# EAGLE board injector (EAGLE 6.6.0)
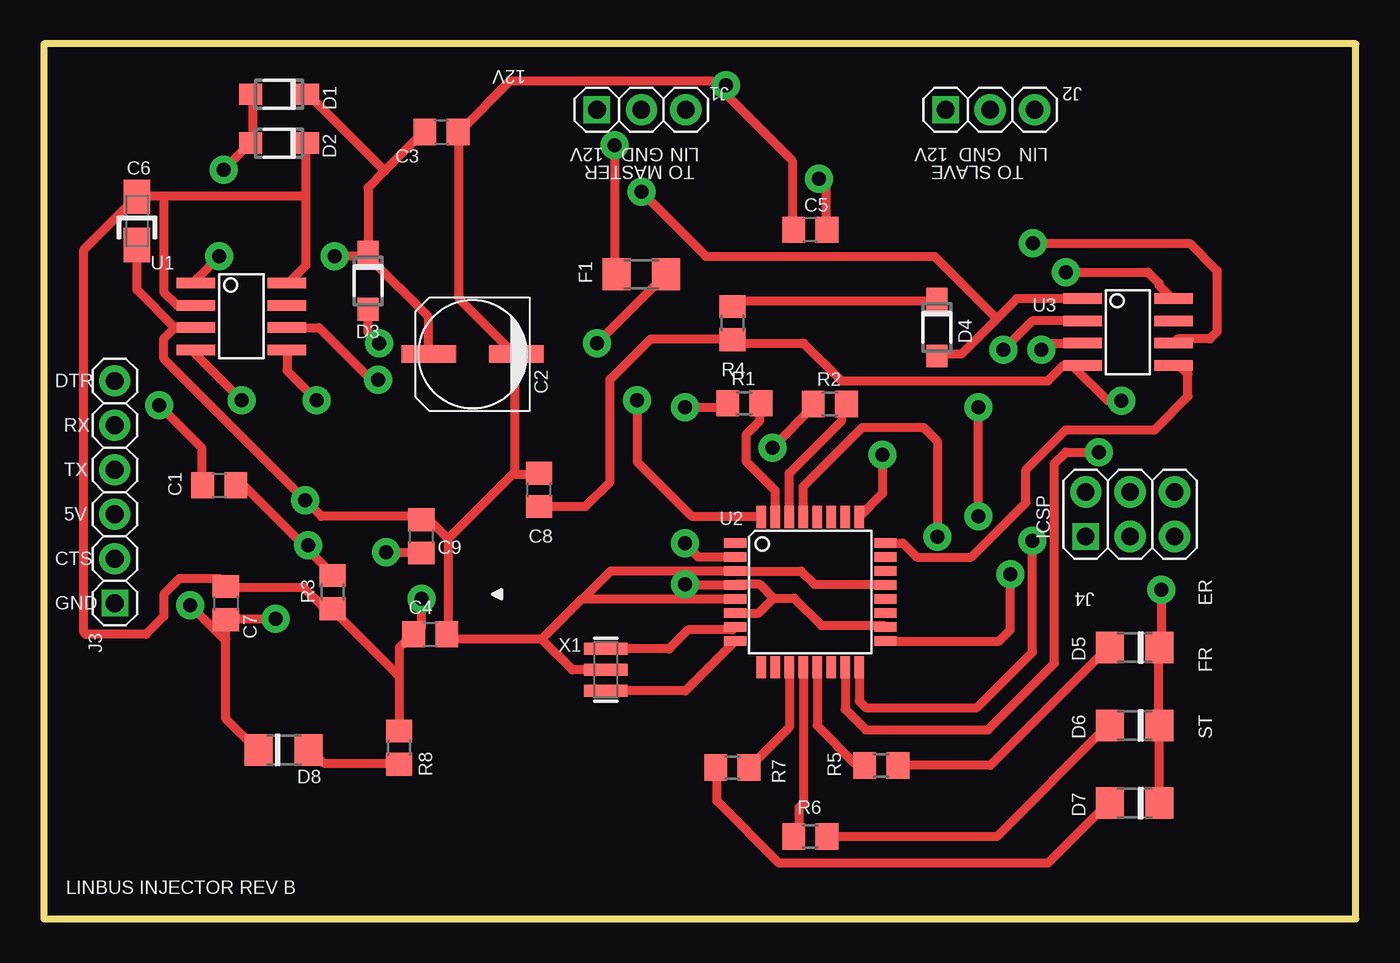
[diagram p0: board, top side]
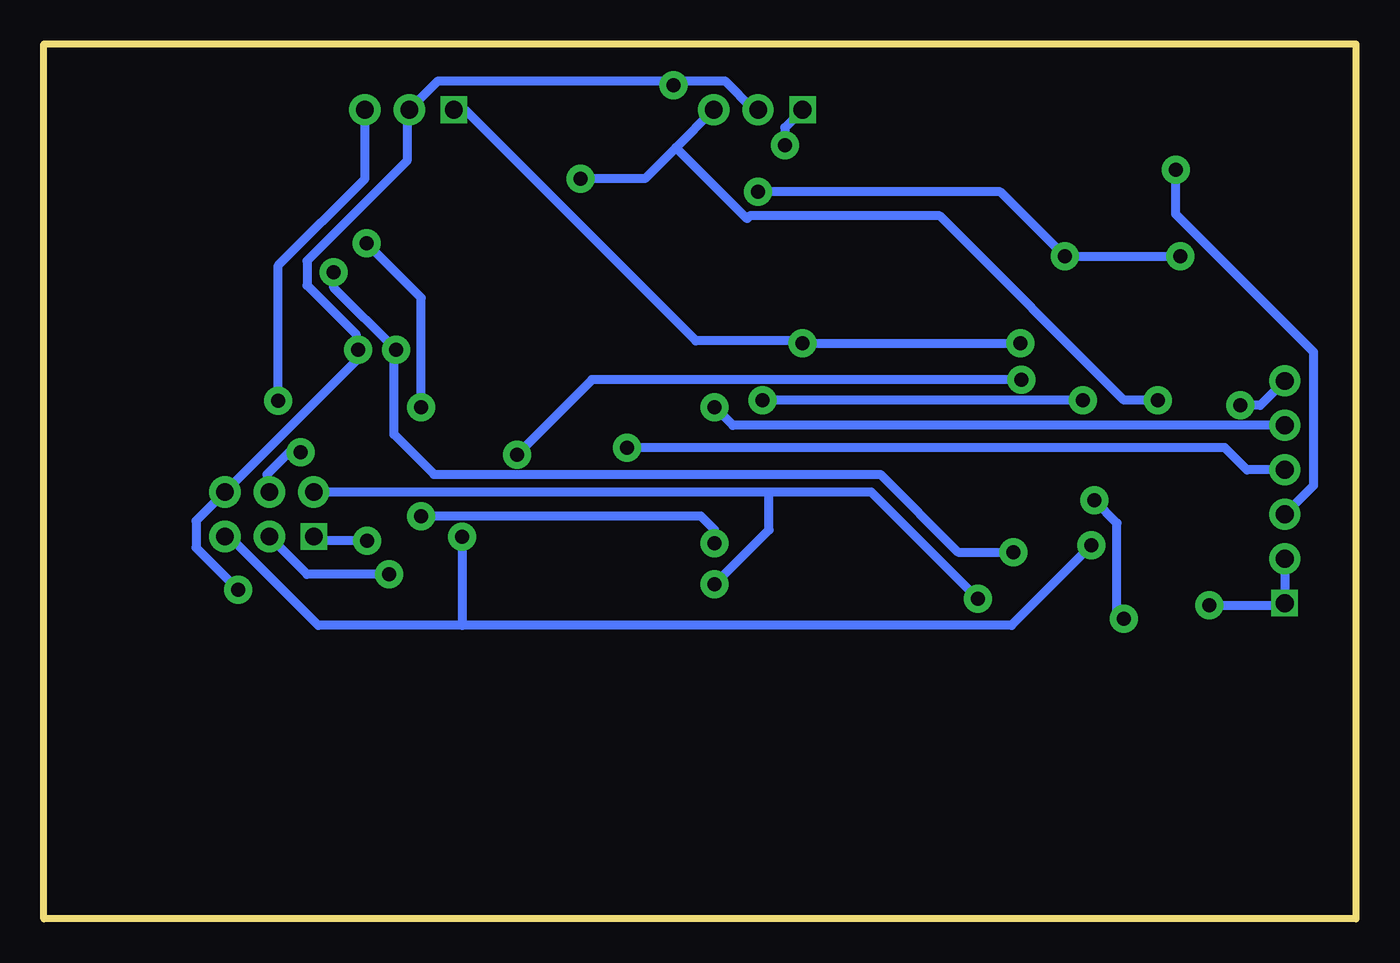
[diagram p1: board, bottom side, seen from below]

Size 75 x 50 mm. Coordinates in mm from the lower left corner, seen from the top.
Outline: 0,0 75,0 75,50 0,50 0,0
Copper layers (1*16): Top 0.035mm / dielectric 1.5mm / Bottom 0.035mm
Design rules "LINbus_rules *": minimum track width 0.5mm, minimum drill 0.8mm, track to track 16mil, track to pad 16mil, pad to pad 16mil, via to via 0.5mm, smd to smd 0mil, copper to edge 1mm, drill to drill 1mm, minimum pad ring 10mil, minimum via ring 0.4mm, stop-mask expansion 4mil, vias tented up to drill 20mil, thermal gap 10mil
Net classes: 1 vcc: width 0.254 mm
tRestrict: area 30.5,45.1 to 38.1,47.6; area 50.2,45.1 to 58.4,47.6; area 58.4,20.3 to 66,25.4; area 2.5,16.5 to 5.7,31.8; area 60.3,30.5 to 63.5,36.2; area 9.5,31.8 to 12.7,36.8

## Footprints (pad centres in the part's own frame; a part is rotated, then mirrored left to right if it is on the bottom)
C0805 = smd 1.3 x 1.5: 1 -0.95,0; 2 0.95,0
UD-6,3X5,8_NICHICON = smd 3.1 x 1: + 2.5,0; - -2.5,0
A/3216-18R = smd 1.95 x 1.5: + 1.375,0; - -1.375,0
SOD123FL = smd 1.31 x 1.22: A 1.625,0; C -1.625,0
1206-LED = smd 1.6 x 1.803: A -1.422,0; C 1.422,0
1206 = smd 1.6 x 1.803: 1 -1.422,0; 2 1.422,0
1X03 = drill 1.016 square: 1 -2.54,0 | drill 1.016 pad 1.778: 2 0,0; 3 2.54,0
1X06 = drill 1.016 square: 1 6.35,0 | drill 1.016 pad 1.778: 2 3.81,0; 3 1.27,0; 4 -1.27,0; 5 -3.81,0; 6 -6.35,0
2X03 = drill 1.016 square: 1 -2.54,-1.27 | drill 1.016 pad 1.778: 2 -2.54,1.27; 3 0,-1.27; 4 0,1.27; 5 2.54,-1.27; 6 2.54,1.27
R0805 = smd 1.3 x 1.5: 1 -0.95,0; 2 0.95,0
SO-08 = smd 0.6 x 2.2: 1 -1.905,-2.6; 2 -0.635,-2.6; 3 0.635,-2.6; 4 1.905,-2.6; 5 1.905,2.6; 6 0.635,2.6; 7 -0.635,2.6; 8 -1.905,2.6
TQFP32-08 = smd 1.27 x 0.559: 1 -4.293,2.8; 2 -4.293,2; 3 -4.293,1.2; 4 -4.293,0.4; 5 -4.293,-0.4; 6 -4.293,-1.2; 7 -4.293,-2; 8 -4.293,-2.8; 17 4.293,-2.8; 18 4.293,-2; 19 4.293,-1.2; 20 4.293,-0.4; 21 4.293,0.4; 22 4.293,1.2; 23 4.293,2; 24 4.293,2.8 | smd 0.559 x 1.27: 9 -2.8,-4.293; 10 -2,-4.293; 11 -1.2,-4.293; 12 -0.4,-4.293; 13 0.4,-4.293; 14 1.2,-4.293; 15 2,-4.293; 16 2.8,-4.293; 25 2.8,4.293; 26 2,4.293; 27 1.2,4.293; 28 0.4,4.293; 29 -0.4,4.293; 30 -1.2,4.293; 31 -2,4.293; 32 -2.8,4.293
RESONATOR-SMD = smd 0.7 x 2.5: 1 -1.2,0; 2 0,0; 3 1.2,0

## Placement (x,y rotation side)
C1  0.1uF  [C0805]  10.03,24.77 0 top
C2  22uF 40V  [UD-6,3X5,8_NICHICON]  24.51,32.26 180 top
C3  0.1uF 50V  [C0805]  22.73,44.96 0 top
C4  0.1uF  [C0805]  22.1,16.26 0 top
C5  220pF  [C0805]  43.81,39.37 180 top
C6  10uF  [A/3216-18R]  5.33,39.88 90 top
C7  0.1uF  [C0805]  10.41,18.03 270 top
C8  220pF  [C0805]  28.32,24.51 90 top
C9  0.1uF  [C0805]  21.59,21.84 90 top
D1  MBR0540  [SOD123FL]  13.46,47.12 180 top
D2  MBR0540  [SOD123FL]  13.46,44.32 180 top
D3  MBR0540  [SOD123FL]  18.54,36.45 270 top
D4  MBR0540  [SOD123FL]  51.05,33.78 270 top
D5  RED  [1206-LED]  62.36,15.49 0 top
D6  GREEN  [1206-LED]  62.36,11.05 0 top
D7  GREEN  [1206-LED]  62.36,6.6 0 top
D8  BLUE  [1206-LED]  13.72,9.65 180 top
F1  500ma Slow  [1206]  34.16,36.83 0 top
J1  [1X03]  34.16,46.23 0 top
J2  [1X03]  54.1,46.23 0 top
J3  [1X06]  4.06,24.38 270 top
J4  ICSP  [2X03]  62.1,23.11 0 top
R1  10K  [R0805]  40.05,29.46 180 top
R2  10K  [R0805]  44.94,29.42 180 top
R3  10k  [R0805]  16.51,18.67 90 top
R4  1K  [R0805]  39.37,34.04 270 top
R5  3.3K  [R0805]  47.88,8.76 180 top
R6  3.3K  [R0805]  43.81,4.7 180 top
R7  3.3K  [R0805]  39.37,8.64 0 top
R8  3.3K  [R0805]  20.32,9.78 90 top
U1  ATA6631  [SO-08]  11.3,34.42 270 top
U2  ATMEGA328  [TQFP32-08]  43.81,18.67 0 top
U3  ATA6631  [SO-08]  61.98,33.53 270 top
X1  16MHz  [RESONATOR-SMD]  32.13,14.22 90 top

## Library data of the parts
C1-C9 D1-D8 F1 J1-J4 R1-R8 U1-U3 X1 = injector

## Nets
+5V: C4.1 C6.+ C7.1 D2.C J4.2 R3.1 R8.2 U1.2 U1.8 U2.4 U2.6 U2.18
+12V: C2.+ C3.1 D1.C D3.C D4.A U1.1 U3.1
DTR: C1.1 J3.6
ERROR_LED: R5.2 U2.13
FRAME_LED: R6.2 U2.12
GND: C2.- C3.2 C4.2 C5.2 C6.- C7.2 C8.2 C9.2 D5.C D6.C D7.C D8.C J1.2 J2.2 J3.1 J3.2 J4.6 U1.3 U2.3 U2.5 U2.21 U3.3 X1.2
GP_DEBUG: U2.10
LIN1: C5.1 J1.3 U1.4
LIN1_RX: U1.5 U2.32
LIN1_TX: U1.6 U2.25
LIN2: C8.1 J2.3 R4.2 U3.4
LIN2_RX: U2.24 U3.5
LIN2_TX: U2.2 U3.6
LIN_BREAK: U2.23
LIN_ISR: U2.26
LIN_TICK: U2.1
MISO/LIN_DATA: J4.1 U2.16
MOSI/LIN_ERR: J4.4 U2.15
N$1: D7.A R7.1
N$2: D8.A R8.1
N$3: D6.A R6.1
N$4: D5.A R5.1
N$6: D3.A F1.2 J2.1
N$9: D4.C R4.1
RESET: C1.2 J4.5 R3.2 U2.29
RXI: J3.5 R1.2
S-5V: D1.A D2.A J3.3
SCK: J4.3 U2.17
SECONDARY_5V: C9.1 U3.2 U3.8
SER_RX: R2.1 U2.30
SER_TX: R1.1 U2.31
STATUS_LED: R7.2 U2.11
TXO: J3.4 R2.2
VBAT: F1.1 J1.1
XTAL1: U2.7 X1.3
XTAL2: U2.8 X1.1

## Tracks (layer width: path | path; a pad name or v marks a point on that pad's centre or on a via)
+5V  (via drill 0.8)
  Top 0.5: 14.99,41.27 14.99,37.34 13.97,36.32 U1.8 | 14.99,41.27 14.99,44.32 D2.C | 14.99,41.27 6.86,41.27 | 6.86,41.27 5.33,41.27 C6.+ 5.21,41.15 2.29,38.23 2.29,16.38 2.41,16.26 5.84,16.26 6.86,17.27 6.86,18.54 7.75,19.43 10.03,19.43 10.29,19.18 C7.1 10.41,18.92 14.86,18.92 15.88,17.91 16.38,17.91 R3.1 16.51,17.65 20.19,13.97 20.32,13.97 | U1.2 7.62,35.05 6.86,35.81 6.86,41.27 | 20.32,13.97 20.32,15.49 21.08,16.26 C4.1 21.34,16.38 21.59,16.64 v21.59,18.29 | 20.32,13.97 R8.2 | U2.6 40.86,17.47 41.72,18.32 | 41.72,18.32 | 41.72,18.32 40.94,19.11 39.56,19.11 U2.4 36.69,19.07 v36.65,19.11 | 41.72,18.32 42.89,18.32 44.45,16.77 48.01,16.77 U2.18
  Bottom 0.5: 33.53,24.38 27.69,24.38 v21.59,18.29 | 33.53,24.38 J4.2 | v36.65,19.11 33.53,22.22 33.53,24.38
+12V  (via drill 0.8)
  Top 0.5: 54.48,34.29 55.63,35.43 U3.1 | 54.48,34.29 52.45,32.26 51.05,32.26 D4.A | D3.C 18.54,41.78 19.49,42.74 | 19.49,42.74 21.72,44.96 C3.1 | 19.49,42.74 15.11,47.12 D1.C | v10.03,37.85 8.76,36.58 8.76,36.32 U1.1 | v16.64,37.85 18.54,37.85 D3.C | C2.+ 21.97,32.26 21.97,34.42 18.67,37.72 D3.C | 54.48,34.29 50.93,37.85 37.85,37.85 v34.16,41.53
  Bottom 0.5: v10.03,37.85 v16.64,37.85 20.32,41.53 v34.16,41.53
DTR  (via drill 0.8)
  Top 0.5: v6.6,29.34 9.02,26.92 9.02,24.77 C1.1
  Bottom 0.5: v6.6,29.34 5.46,29.34 J3.6
ERROR_LED
  Top 0.5: U2.13 44.22,11.03 46.35,8.89 46.8,8.89 R5.2
FRAME_LED
  Top 0.5: U2.12 43.41,6.58 43.18,6.35 43.18,5.01 R6.2
GND  (via drill 0.8)
  Top 0.5: 10.41,16 10.41,11.43 12.19,9.65 D8.C | 10.41,16 C7.2 10.48,17.16 v13.26,17.16 | v8.38,17.91 10.29,16 10.41,16 | C6.- 5.33,35.94 7.49,33.78 | U1.3 7.49,33.78 | 23.11,21.72 23.11,16.26 C4.2 23.32,15.98 28.46,15.98 | 23.11,21.72 22.1,22.73 21.59,22.73 C9.2 21.46,22.99 15.88,22.99 15.14,23.72 v14.95,23.91 6.86,32 6.86,33.15 7.49,33.78 | 26.92,25.4 26.8,25.4 23.11,21.72 | 26.92,25.4 28.32,25.4 C8.2 | D7.C 63.75,6.6 63.75,11.05 D6.C 63.75,11.18 63.75,15.49 D5.C 63.88,15.62 v63.88,18.8 | U3.3 57.4,32.89 v57.02,32.51 | 38.73,47.37 38.23,47.88 26.67,47.88 23.88,45.09 C3.2 23.75,44.96 23.75,35.43 26.92,32.26 C2.- 26.92,32.13 26.92,25.4 | 38.73,47.37 42.8,43.31 42.8,39.37 C5.2 | v38.99,47.62 38.73,47.37 | U2.5 30.8,18.27 | 30.8,18.27 30.75,18.27 28.46,15.98 | X1.2 30.22,14.22 28.46,15.98 | U2.21 48.07,19.11 44.06,19.11 43.29,19.87 U2.3 32.4,19.87 30.8,18.27
  Bottom 0.5: J3.2 J3.1 4.19,17.91 v8.38,17.91 | v63.88,18.8 66.29,21.21 66.29,22.73 J4.6 57.02,32 v57.02,32.51 57.15,32.64 57.15,33.4 59.94,36.2 59.94,37.59 54.23,43.31 54.23,46.1 J2.2 52.45,47.88 38.99,47.88 | J1.2 34.42,46.23 36.07,47.88 38.99,47.88 | v38.99,47.62 38.99,47.88 | v13.26,17.16 13.65,17.55 13.65,22.61 v14.95,23.91 | v14.95,23.91
LIN1  (via drill 0.8)
  Top 0.5: v44.32,42.29 44.7,41.91 44.7,39.37 C5.1 | U1.4 8.7,32.23 v11.31,29.63
  Bottom 0.5: v44.32,42.29 40.64,42.29 38.86,44.07 | J1.3 38.86,44.07 | 38.86,44.07 34.8,40.01 34.64,40.16 23.78,40.16 13.26,29.63 v11.31,29.63
LIN1_RX  (via drill 0.8)
  Top 0.5: U1.5 13.9,31.32 v15.6,29.63 | v33.92,29.63 33.92,26.12 37.04,23 40.97,23 U2.32
  Bottom 0.5: v15.6,29.63 v33.92,29.63
LIN1_TX  (via drill 0.8)
  Top 0.5: U1.6 15.73,33.78 18.71,30.8 v19.11,30.8 | v47.96,26.51 47.96,24.3 U2.25
  Bottom 0.5: v19.11,30.8 43.67,30.8 v47.96,26.51
LIN2  (via drill 0.8)
  Top 0.5: v61.59,29.59 60.83,29.59 58.93,31.5 U3.4 58.29,31.62 57.4,30.73 45.59,30.73 43.43,32.89 39.5,32.89 R4.2 39.31,33.14 34.7,33.14 32.36,30.8 32.36,24.95 30.97,23.56 C8.1
  Bottom 0.5: J2.3 56.64,42.29 61.59,37.34 v61.59,29.59
LIN2_RX
  Top 0.5: U3.5 64.9,31.62 65.41,31.11 65.41,29.84 63.5,27.94 58.42,27.94 56.14,25.66 56.14,23.78 53.02,20.66 49.91,20.66 49.1,21.47 U2.24
LIN2_TX  (via drill 0.8)
  Top 0.5: U2.2 37.42,20.67 v36.65,21.44 | v53.41,23 v53.41,29.24 | v56.53,38.6 65.5,38.6 67.06,37.04 67.06,33.53 66.67,33.14 64.82,33.14 U3.6
  Bottom 0.5: v36.65,21.44 36.65,22.22 37.43,23 v53.41,23 | v53.41,29.24 53.41,35.48 v56.53,38.6
MISO/LIN_DATA  (via drill 0.8)
  Top 0.5: U2.16 46.62,12.44 46.99,12.06 53.34,12.06 56.52,15.24 v56.52,21.59
  Bottom 0.5: v56.52,21.59 59.31,21.59 J4.1
MOSI/LIN_ERR  (via drill 0.8)
  Top 0.5: U2.15 45.81,11.97 46.99,10.79 53.98,10.79 57.78,14.61 57.78,26.04 58.42,26.67 v60.33,26.67
  Bottom 0.5: v60.33,26.67 60.96,26.67 62.23,25.4 62.23,24.51 J4.4
N$1
  Top 0.5: R7.1 38.48,8.64 38.48,6.73 42.04,3.17 57.4,3.17 60.83,6.6 D7.A
N$2
  Top 0.5: R8.1 20.32,8.89 16,8.89 15.24,9.65 D8.A
N$3
  Top 0.5: R6.1 54.48,4.7 60.83,11.05 D6.A
N$4
  Top 0.5: R5.1 54.1,8.76 60.83,15.49 D5.A
N$6  (via drill 0.8)
  Top 0.5: D3.A 18.54,33.53 v19.18,32.89 | v31.62,32.89 35.56,36.83 F1.2
  Bottom 0.5: v19.18,32.89 v31.62,32.89 31.75,33.02 37.72,33.02 50.93,46.23 J2.1
N$9
  Top 0.5: D4.C 51.05,35.31 39.62,35.31 39.37,35.05 R4.1
RESET  (via drill 0.8)
  Top 0.5: C1.2 11.43,24.77 14.99,21.21 | 14.99,21.21 16.51,19.68 R3.2 | v15.11,21.34 14.99,21.21 | U2.29 43.41,24.7 46.79,28.07 50.3,28.07 51.08,27.29 v51.08,21.83
  Bottom 0.5: J4.5 64.39,21.84 59.31,16.76 51.08,16.76 | 51.08,16.76 19.68,16.76 v15.11,21.34 | v51.08,21.83 51.08,16.76
RXI  (via drill 0.8)
  Top 0.5: v36.65,29.24 38.88,29.24 R1.2
  Bottom 0.5: J3.5 35.6,28.19 v36.65,29.24
S-5V  (via drill 0.8)
  Top 0.5: D1.A 11.94,47.12 11.94,44.32 D2.A 11.68,44.2 v10.29,42.8
  Bottom 0.5: v10.29,42.8 10.29,40.26 2.41,32.38 2.41,24.77 J3.3
SCK  (via drill 0.8)
  Top 0.5: U2.17 54.6,15.87 55.24,16.51 v55.24,19.68
  Bottom 0.5: v55.24,19.68 59.94,19.68 J4.3
SECONDARY_5V  (via drill 0.8)
  Top 0.5: v19.56,20.95 21.59,20.95 C9.1 | v54.86,32.51 56.52,34.16 U3.2 | v58.42,36.96 63.12,36.96 63.75,36.32 63.75,36.2 64.52,35.43 U3.8
  Bottom 0.5: v19.56,20.95 22.73,20.95 27.18,25.4 52.69,25.4 54.97,27.68 54.97,32.4 v54.86,32.51 58.42,36.07 v58.42,36.96
SER_RX
  Top 0.5: U2.30 42.62,25.46 45.62,28.46 45.62,29.15 R2.1
SER_TX
  Top 0.5: U2.31 41.81,24.47 40.16,26.12 40.16,27.68 | 40.16,27.68 | 40.16,27.68 40.94,28.46 40.94,29.4 R1.1
STATUS_LED
  Top 0.5: U2.11 42.62,10.93 R7.2
TXO  (via drill 0.8)
  Top 0.5: v41.66,26.92 44.07,29.34 44.07,29.84 R2.2
  Bottom 0.5: v41.66,26.92 7.49,26.92 6.22,25.65 J3.4
VBAT  (via drill 0.8)
  Top 0.5: v32.64,44.2 32.64,36.83 F1.1
  Bottom 0.5: v32.64,44.2 32.64,45.21 J1.1
XTAL1
  Top 0.5: U2.7 39.36,16.51 36.83,16.51 35.74,15.42 X1.3
XTAL2
  Top 0.5: U2.8 36.68,13.02 X1.1

## Text on the board
tPlace: 12V | 12V | GND | LIN | 12V | GND | LIN | TO MASTER | TO SLAVE | DTR | RX | TX | 5V | ICSP | CTS | GND | ER | FR | ST | LINBUS INJECTOR REV B
bStop: TO MASTER | TO SLAVE | LINBUS INJECTOR - REV B